# Altium PCB DPAdapter.PcbDoc
Units mm, origin at the board's own origin, x right, y up, seen from the top; angles counter-clockwise.
Board outline 143.51 x 33.02 mm, 4 copper layers (Top Layer, Int1 (GND), Int2 (GND), Bottom Layer), stack 1.369 mm thick; 9 components, 23 nets, 96 pads, 4 vias.
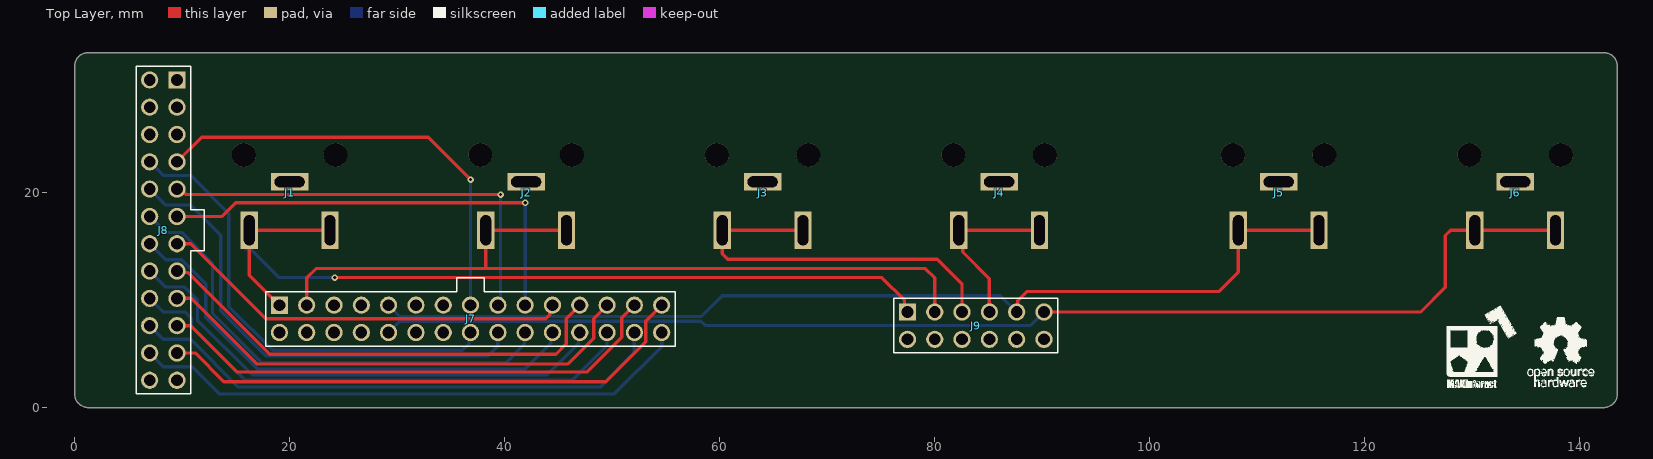
[diagram p0: Top Layer view]
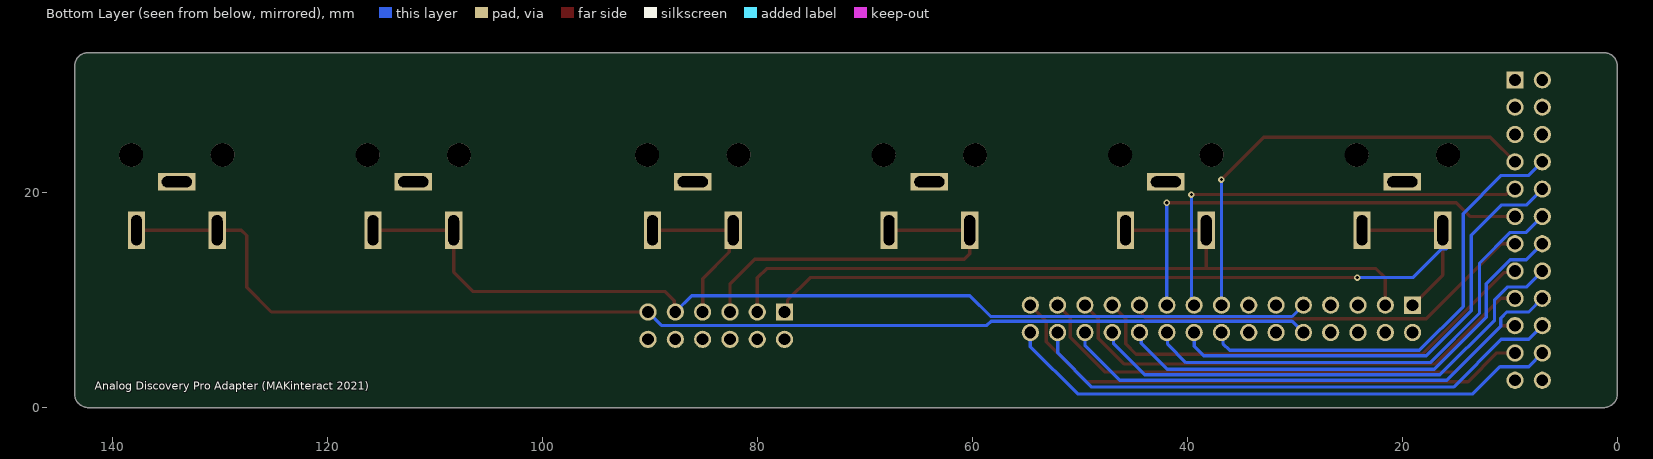
[diagram p1: Bottom Layer view, seen from below]
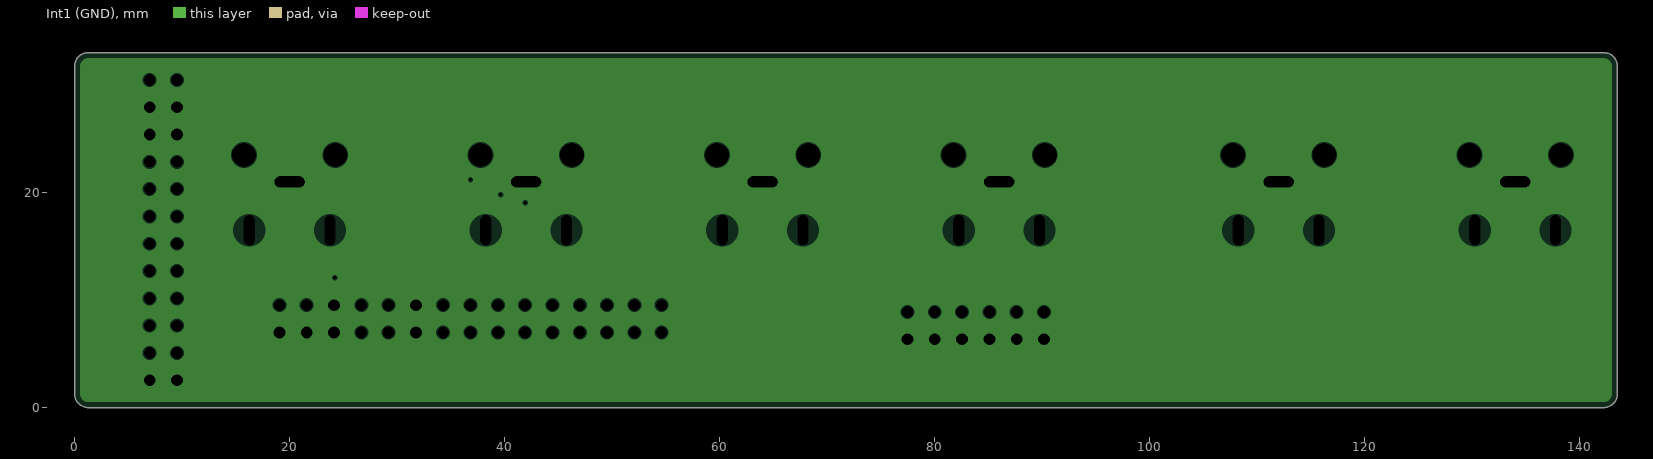
[diagram p2: Int1 (GND), clearances drawn from the general rule]
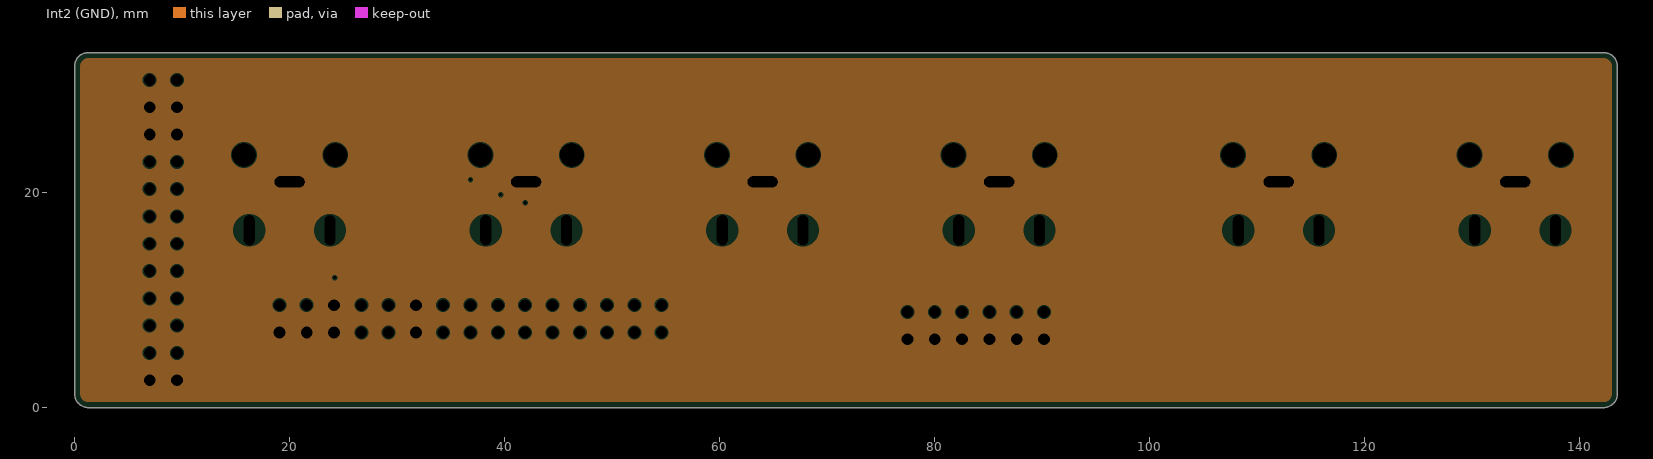
[diagram p3: Int2 (GND), clearances drawn from the general rule]
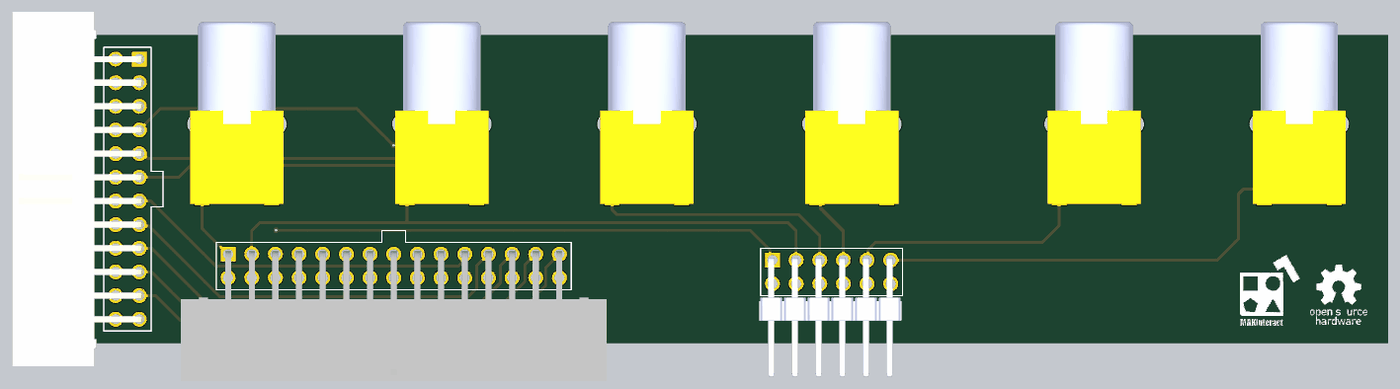
[diagram p4: 3D render of the assembled board from above, using the file's embedded part models]

## Layer stack, top to bottom
Top Solder: solder mask 0.0254, SM-001, Dk 4
Top Layer: signal copper 0.035
Dielectric 1: prepreg 0.1295, PP-017, Dk 4.3
Dielectric 2: prepreg 0.1295, PP-017, Dk 4.3
Int1 (GND): plane copper 0.035, net GND
Dielectric 3: core 0.7112, Core-039, Dk 4.8
Int2 (GND): plane copper 0.035, net GND
Dielectric 4: prepreg 0.1295, PP-017, Dk 4.3
Dielectric 5: prepreg 0.1295, PP-017, Dk 4.3
Bottom Layer: signal copper 0.035
Bottom Solder: solder mask 0.0254, SM-001, Dk 4

## Board outline
0,1.27 0,31.75 cw(c1.27,31.75) 1.27,33.02 142.24,33.02 cw(c142.24,31.75) 143.51,31.75 143.51,1.27 cw(c142.24,1.27) 142.24,0 1.27,0 cw(c1.27,1.27)

## Design rules (kind name [scope] priority, off if disabled: settings)
Clearance "Around polygon" [IsRegion] p1: gap=0.3 ignorepadtopadclearanceinfootprint=FALSE
Clearance [All] p2: gap=0.102 ignorepadtopadclearanceinfootprint=FALSE
ComponentClearance [All] p1: gap=0.2 collisioncheckmode=3 verticalgap=0.2 showdistances=FALSE
HoleSize [All] p1: absolutevalues=TRUE maxlimit=3.5 minlimit=0.2 maxpercent=80.000 minpercent=20.000
HoleToHoleClearance [All] p1: gap=0.305 allowstackedmicrovias=TRUE
MinimumSolderMaskSliver [All] p1: minsoldermaskwidth=0.003
PlaneClearance [All] p1: clearance=0.1
PlaneConnect [All] p1: planeconnectstyle=Direct reliefexpansion=0.508 reliefentries=4 reliefconductorwidth=0.254 reliefairgap=0.254
PolygonConnect [All] p1: connectstyle=Direct reliefconductorwidth=0.254 reliefentries=4 polygonreliefangle="90 Angle" airgapwidth=0.254
RoutingVias [All] p1: holewidth=0.3 width=0.6 viastyle="Through Hole" minholewidth=0.3 minwidth=0.6 maxholewidth=0.3 maxwidth=0.6
SilkToSilkClearance [All] p1: silktosilkclearance=0.1
SilkToSolderMaskClearance [IsPad] p1: minsilkscreentomaskgap=0.1 clearancetoexposedcopper=TRUE
SolderMaskExpansion [All] p1: expansion=0.1 istentingtop=FALSE
UnRoutedNet MountingHoles [(InNet('NetMH1_1') AND InNet('NetMH2_1') AND InNet('NetMH3_1') AND InNet('NetMH4_1'))] p1 off:
UnRoutedNet [All] p2:
Width Width_POWER [InNet ('+*') or InNet('GND')] p1: maxlimit=0.762 minlimit=0.254 preferedwidth=0.305
Width [All] p2: maxlimit=0.305 minlimit=0.102 preferedwidth=0.152
21 further rules are at their usual default settings.

## Components (designator, comment, footprint, x,y, rotation, side; value= is the part's Value field where it differs from the comment)
J1 "RCA" PJRAN1X1U 20,21 r0 top locked
J2 "RCA" PJRAN1X1U 42,21 r0 top locked
J3 "RCA" PJRAN1X1U 64,21 r0 top locked
J4 "RCA" PJRAN1X1U 86,21 r0 top locked
J5 "RCA" PJRAN1X1U 112,21 r0 top locked
J6 "RCA" PJRAN1X1U 134,21 r0 top locked
J7 "30 connector" AWHW_30_254 19.05,9.525 r90 top
J8 "24 connector" AWHW_24_254 9.525,30.48 r0 top
J9 "HDR12" HDR12_2.54 77.47,8.89 r90 top

## Footprints (in the part's own frame and the unit in brackets; to place one, negate y for a bottom-side part, rotate by r counter-clockwise, add the part's x,y. Pads: shape width x height; smd on the part's side, far side on the other; paste and mask are expansions set on the pad)
AWHW_24_254 [mm]
  rect 1.6x1.6 hole 1.1: 1(0,0)
  round 1.6 hole 1.1: 2(0,-2.54) 3(0,-5.08) 4(0,-7.62) 5(0,-10.16) 6(0,-12.7) 7(0,-15.24) 8(0,-17.78) 9(0,-20.32) 10(0,-22.86) 11(0,-25.4) 12(0,-27.94) 13(-2.54,0) 14(-2.54,-2.54) 15(-2.54,-5.08) 16(-2.54,-7.62) 17(-2.54,-10.16) 18(-2.54,-12.7) 19(-2.54,-15.24) 20(-2.54,-17.78) 21(-2.54,-20.32) 22(-2.54,-22.86) 23(-2.54,-25.4) 24(-2.54,-27.94)
  silkscreen extent -3.81,-29.21 2.54,1.27, body extent -13.63,-33.02 0.35,5.08, height 8.96
AWHW_30_254 [mm]
  rect 1.6x1.6 hole 1.1: 1(0,0)
  round 1.6 hole 1.1: 2(0,-2.54) 3(0,-5.08) 4(0,-7.62) 5(0,-10.16) 6(0,-12.7) 7(0,-15.24) 8(0,-17.78) 9(0,-20.32) 10(0,-22.86) 11(0,-25.4) 12(0,-27.94) 13(0,-30.48) 14(0,-33.02) 15(0,-35.56) 16(-2.54,0) 17(-2.54,-2.54) 18(-2.54,-5.08) 19(-2.54,-7.62) 20(-2.54,-10.16) 21(-2.54,-12.7) 22(-2.54,-15.24) 23(-2.54,-17.78) 24(-2.54,-20.32) 25(-2.54,-22.86) 26(-2.54,-25.4) 27(-2.54,-27.94) 28(-2.54,-30.48) 29(-2.54,-33.02) 30(-2.54,-35.56)
  silkscreen extent -3.81,-36.83 2.54,1.27, body extent -13.65,-40.64 0.33,5.08, height 8.81
HDR12_2.54 [mm]
  rect 1.6x1.6 hole 1.1: 1(0,0)
  round 1.6 hole 1.1: 2(0,-2.54) 3(0,-5.08) 4(0,-7.62) 5(0,-10.16) 6(0,-12.7) 7(-2.54,0) 8(-2.54,-2.54) 9(-2.54,-5.08) 10(-2.54,-7.62) 11(-2.54,-10.16) 12(-2.54,-12.7)
  silkscreen extent -3.81,-13.97 1.27,1.27, body extent -12.51,-13.84 0.25,1.4, height 5.01
PJRAN1X1U [mm]
  rect 3.5x1.6 hole 1 slot 2.8 at 0 deg: 1(0,0)
  rect 1.6x3.5 hole 1 slot 2.8 at 90 deg: 2(-3.75,-4.5) 3(3.75,-4.5)
  round 2.2 hole 2.2 unplated: ""(-4.25,2.5) ""(4.25,2.5)
  body extent -5,-6.06 5,13.45, height 11.52

## Part data
J1 J2 J3 J4 J5 J6: library part PJRAN1X1U04X, "3.20mm ID, 9.00mm OD (RCA) Phono (RCA) Jack Mono Connector Solder", Package=None, Availability="In Stock", Check_prices=https://www.snapeda.com/parts/PJRAN1X1U04X/Switchcraft%20Inc./view-part/64730/?ref=eda, MF="Switchcraft Inc.", MP=PJRAN1X1U04X, Price=None, SnapEDA_Link=https://www.snapeda.com/parts/PJRAN1X1U04X/Switchcraft%20Inc./view-part/64730/?ref=snap
J7: library part DIGILENT_RIBBON
J8: library part DIGILENT_RIBBON_SMALL
J9: library part HDR_12_2.54

## Via types
v1: diameter 0.6, hole 0.3, Top Layer to Bottom Layer, tented both sides, 4 vias

## Nets (pads, with @x,y where several pads share a name; then routed paths per layer and width w, separated by ;. In a path a pad name is that pad's centre, name@x,y a point inside that pad or via, vN(x,y) a via of type N, cw(c..) or ccw(c..) an arc to the next point about the centre after c; other vN are vias at no path point)
0: J7.8 J8.4 | length 41.6
  Top Layer w0.305: J8.4 11.811,25.146 32.893,25.146 36.494,21.545 v1(36.83,21.209)
  Bottom Layer w0.305: J7.8 v1(36.83,21.209)
1: J7.9 J8.5 | length 40.7
  Top Layer w0.305: J8.5 9.875,20.32 10.383,19.812 v1(39.624,19.812)
  Bottom Layer w0.305: J7.9 39.618,9.773 39.618,10.345 39.624,10.351 v1(39.624,19.812)
2: J7.10 J8.6 | length 42.4
  Top Layer w0.305: J8.6 13.716,17.78 14.986,19.05 v1(41.91,19.05)
  Bottom Layer w0.305: J7.10 v1(41.91,19.05)
3: J7.11 J8.7 | length 38.7
  Top Layer w0.305: J8.7 10.795,15.24 17.78,8.255 43.815,8.255 44.202,8.642 44.202,9.277 J7.11
4: J7.12 J8.8 | length 44
  Top Layer w0.305: J8.8 9.665,12.56 10.554,12.56 18.161,4.953 44.78,4.953 45.745,5.918 45.745,8.28 J7.12
5: J7.13 J8.9 | length 45.9
  Top Layer w0.305: J8.9 10.846,10.16 16.942,4.064 45.898,4.064 48.285,6.452 48.285,8.28 J7.13
6: J7.14 J8.10 | length 48
  Top Layer w0.305: J8.10 10.795,7.62 15.113,3.302 47.65,3.302 50.902,6.553 50.902,8.357 J7.14
7: J7.15 J8.11 | length 50.3
  Top Layer w0.305: J8.11 11.227,5.08 13.894,2.413 49.403,2.413 53.124,6.134 53.124,8.039 J7.15
8: J7.23 J8.16 | length 43.4
  Bottom Layer w0.305: J8.16 8.255,21.59 10.795,21.59 14.351,18.034 14.351,9.398 18.415,5.334 36.068,5.334 36.69,5.956 36.69,6.845 J7.23
9: J7.24 J8.17 | length 44.6
  Bottom Layer w0.305: J8.17 8.471,18.834 10.794,18.834 13.589,16.039 13.589,9.017 17.78,4.826 38.481,4.826 39.37,5.715 J7.24
10: J7.25 J8.18 | length 45
  Bottom Layer w0.305: J8.18 8.471,16.294 9.962,16.294 12.827,13.429 12.827,8.763 17.399,4.191 40.132,4.191 41.847,5.906 41.847,6.922 J7.25
11: J7.26 J8.19 | length 46.1
  Bottom Layer w0.305: J8.19 8.471,13.754 9.962,13.754 12.192,11.524 12.192,8.382 17.018,3.556 41.885,3.556 44.298,5.969 44.298,6.833 J7.26
12: J7.27 J8.20 | length 47.3
  Bottom Layer w0.305: J8.20 8.471,11.214 10.249,11.214 11.43,10.033 11.43,8.128 16.51,3.048 43.967,3.048 46.863,5.944 46.863,6.858 J7.27
13: J7.28 J8.21 | length 48.7
  Bottom Layer w0.305: J8.21 8.255,8.89 10.287,8.89 10.846,8.331 10.846,7.569 15.875,2.54 46.279,2.54 49.53,5.791 J7.28
14: J7.29 J8.22 | length 50.7
  Bottom Layer w0.305: J8.22 8.255,6.35 10.795,6.35 15.24,1.905 48.895,1.905 52.07,5.08 J7.29
15: J7.30 J8.23 | length 52.3
  Bottom Layer w0.305: J8.23 8.255,3.81 10.922,3.81 13.462,1.27 50.216,1.27 54.61,5.664 J7.30
CH1: J1.2 J1.3 J7.1 J9.1 | length 82.2
  Top Layer w0.305: J7.1 16.25,12.325 J1.2 J1.3 ; v1(24.206,12.09) 75.082,12.09 77.204,9.969 77.204,9.156 J9.1
  Bottom Layer w0.305: J1.2 15.694,15.944 15.694,14.994 15.948,14.741 16.379,14.741 19.03,12.09 v1(24.206,12.09)
CH2: J2.2 J2.3 J7.2 J9.2 | length 76
  Top Layer w0.305: J7.2 21.59,12.065 22.454,12.929 38.1,12.929 ; J2.3 J2.2 38.25,13.079 38.1,12.929 ; J9.2 80.01,12.065 79.146,12.929 38.1,12.929
CH3: J3.2 J3.3 J9.3 | length 35.8
  Top Layer w0.305: J3.3 J3.2 60.25,14.299 60.757,13.792 80.239,13.792 82.55,11.481 J9.3
CH4: J4.2 J4.3 J9.4 | length 16.3
  Top Layer w0.305: J9.4 85.09,11.989 82.607,14.471 82.607,16.143 J4.2 J4.3
GND: J1.1 J2.1 J3.1 J4.1 J5.1 J6.1 J7.3 J7.6 J7.16 J7.17 J7.18 J7.21 J8.2 J8.3 J8.12 J8.14 J8.15 J8.24 J9.7 J9.8 J9.9 J9.10 J9.11 J9.12
W1: J5.2 J5.3 J7.5 J9.5 | length 94.4
  Top Layer w0.305: J9.5 87.732,8.992 87.732,9.957 88.57,10.795 106.426,10.795 108.235,12.604 108.235,16.485 J5.2 J5.3
  Bottom Layer w0.305: J7.5 30.264,8.471 58.28,8.471 60.223,10.414 86.106,10.414 J9.5
W2: J6.2 J6.3 J7.20 J9.6 | length 115.6
  Top Layer w0.305: J9.6 125.197,8.89 127.5,11.193 127.5,16.007 127.993,16.5 J6.2 J6.3
  Bottom Layer w0.305: J7.20 30.264,8.039 58.255,8.039 58.649,7.645 88.925,7.645 J9.6
pads on no net: J1. J2. J3. J4. J5. J6. J7.4 J7.7 J7.19 J7.22 J8.1 J8.13

## Polygon pours and split planes (outlines as drawn)
GND on Int1 (GND) (split plane): 1.27,32.51 142.24,32.51 142.253,32.511 142.359,32.502 142.475,32.475 142.586,32.429 142.688,32.366 142.779,32.289 142.856,32.198 142.919,32.096 142.965,31.985 142.992,31.869 143.001,31.763 143,31.75 143,1.27 143.001,1.257 142.992,1.151 142.965,1.035 142.919,0.924 142.856,0.822 142.779,0.731 142.688,0.654 142.586,0.591 142.475,0.545 142.359,0.518 142.253,0.509 142.24,0.51 1.27,0.51 1.257,0.509 1.151,0.518 1.035,0.545 0.924,0.591 0.822,0.654 0.731,0.731 0.654,0.822 0.591,0.924 0.545,1.035 0.518,1.151 0.509,1.257 0.51,1.27 0.51,31.75 0.509,31.763 0.518,31.869 0.545,31.985 0.591,32.096 0.654,32.198 0.731,32.289 0.822,32.366 0.924,32.429 1.035,32.475 1.151,32.502 1.257,32.511
GND on Int2 (GND) (split plane): 1.27,32.51 142.24,32.51 142.253,32.511 142.359,32.502 142.475,32.475 142.586,32.429 142.688,32.366 142.779,32.289 142.856,32.198 142.919,32.096 142.965,31.985 142.992,31.869 143.001,31.763 143,31.75 143,1.27 143.001,1.257 142.992,1.151 142.965,1.035 142.919,0.924 142.856,0.822 142.779,0.731 142.688,0.654 142.586,0.591 142.475,0.545 142.359,0.518 142.253,0.509 142.24,0.51 1.27,0.51 1.257,0.509 1.151,0.518 1.035,0.545 0.924,0.591 0.822,0.654 0.731,0.731 0.654,0.822 0.591,0.924 0.545,1.035 0.518,1.151 0.509,1.257 0.51,1.27 0.51,31.75 0.509,31.763 0.518,31.869 0.545,31.985 0.591,32.096 0.654,32.198 0.731,32.289 0.822,32.366 0.924,32.429 1.035,32.475 1.151,32.502 1.257,32.511

## Silkscreen, mask and mechanical layers (free items; w line width, h text height)
Top Overlay:
  drawing of 32 lines, arcs and shapes, not listed
Bottom Overlay:
  text "Analog Discovery Pro Adapter (MAKinteract 2021)" at 141.656,1.651 h0.76
Cutout:
  the board outline again, w0.127